# Altium PCB IMU_PCB_20241_VIAS02_MP.PcbDoc
Units mm, origin at the board's own origin, x right, y up, seen from the top; angles counter-clockwise.
Board outline 9 x 7 mm, 2 copper layers (Top Layer, Bottom Layer), stack 0.325 mm thick; 16 components, 20 nets, 87 pads, 33 vias.
Unrouted connection lines stored in the file: 2.
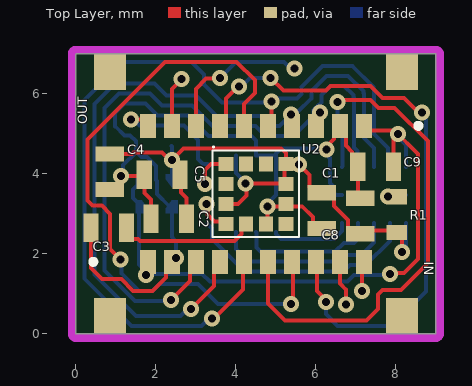
[diagram p0: Top Layer view]
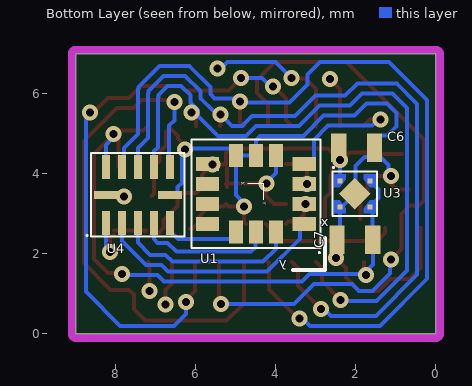
[diagram p1: Bottom Layer view, seen from below]
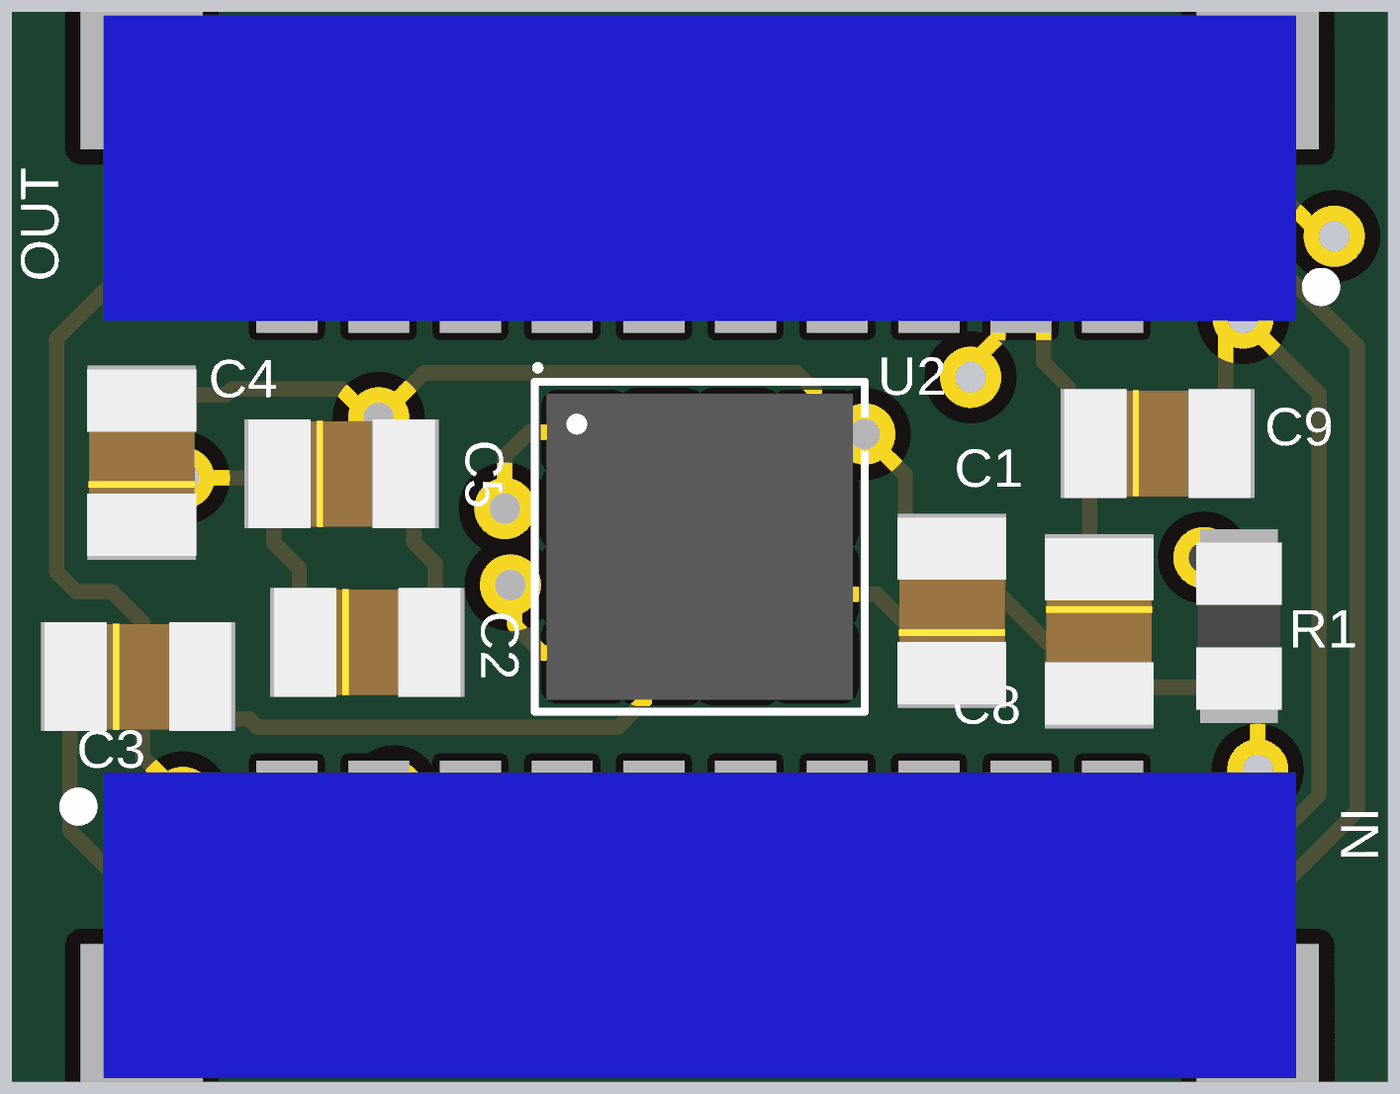
[diagram p2: 3D render of the assembled board from above, using the file's embedded part models]
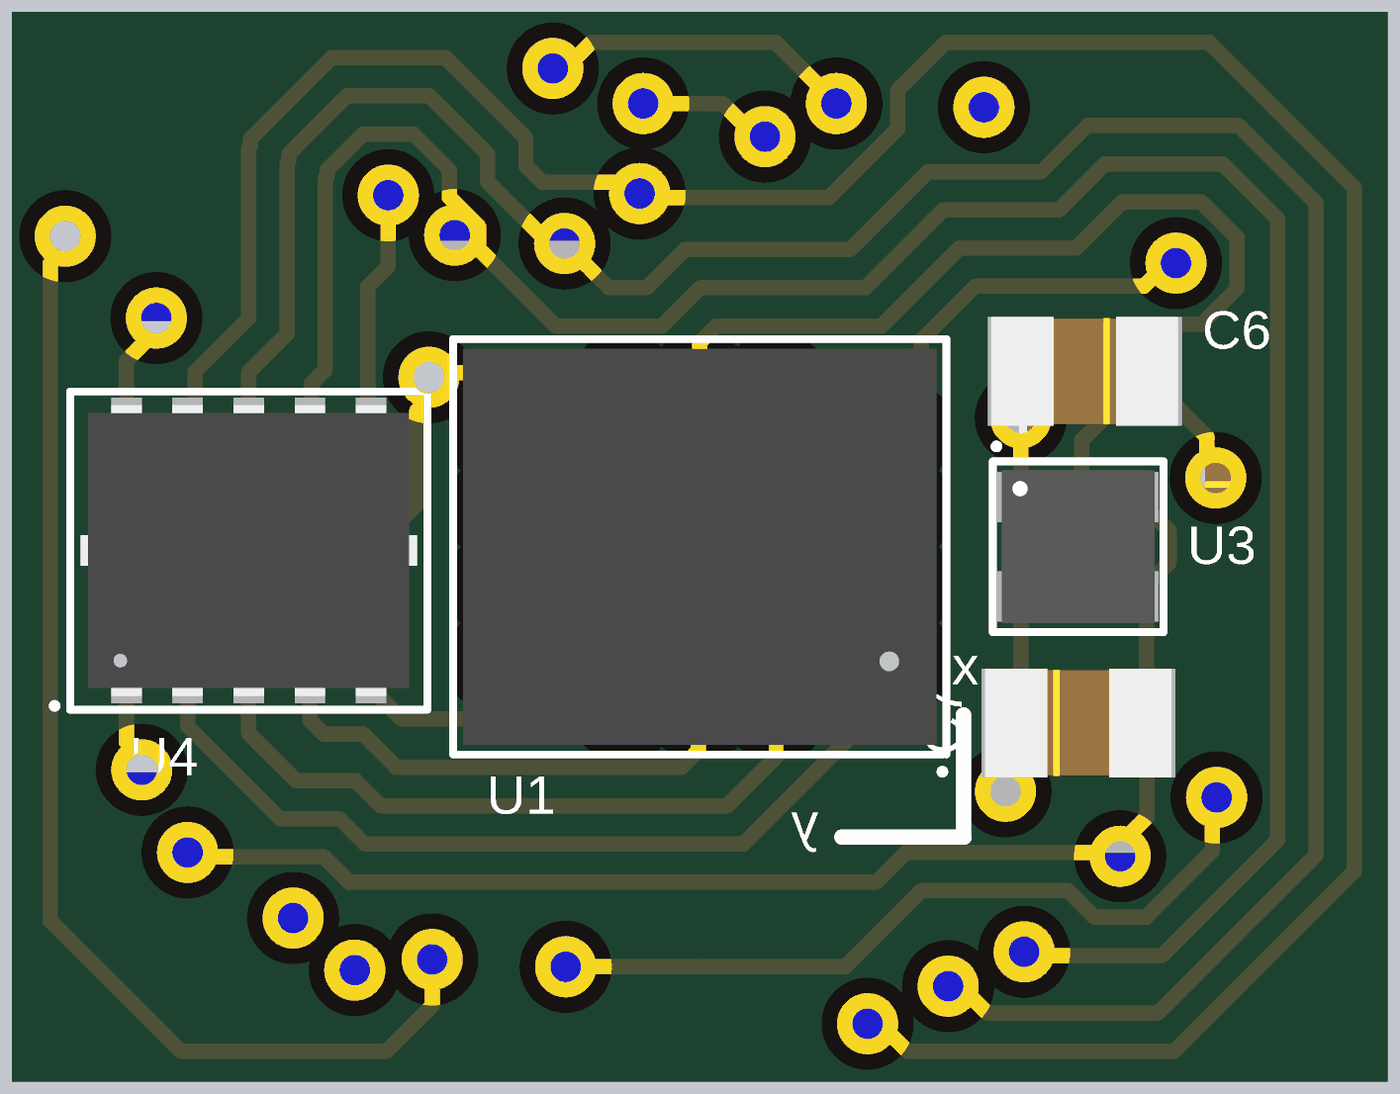
[diagram p3: 3D render of the assembled board from below, using the file's embedded part models]

## Layer stack, top to bottom
Top Solder: solder mask 0.0102, Solder Resist, Dk 3.5
Top Layer: signal copper 0.0356
Dielectric 1: core 0.254, FR-4, Dk 4.2
Bottom Layer: signal copper 0.0356
Solder Side: solder mask 0.0102, Solder Resist, Dk 3.5

## Board outline
0,7 0,0 9,0 9,7

## Design rules (kind name [scope] priority, off if disabled: settings)
Clearance Clearance_tracks [All] p1: gap=0.1 ignorepadtopadclearanceinfootprint=FALSE except(0: Arc-Hole Track-Hole SMDPad-Hole THPad-Hole Via-Hole Fill-Hole Poly-Hole Region-Hole Text-Hole; 0.15: Arc-Arc Arc-Track Arc-SMDPad Arc-THPad Arc-Via Arc-Fill Arc-Poly Arc-Region Track-Track Track-SMDPad Track-THPad Track-Via Track-Fill Track-Poly Track-Region)
Clearance Clearance_3 [OnLayer('Power Plane (VCC)') or InNet('4V')] p2: gap=0.254 ignorepadtopadclearanceinfootprint=FALSE except(0: Arc-Hole Track-Hole SMDPad-Hole THPad-Hole Via-Hole Fill-Hole Poly-Hole Region-Hole Text-Hole)
Clearance Clearance_2 [(InComponent('MPU-9250') AND OnLayer('Bottom Layer') AND HasFootprint('MPU-2950'))] p3: gap=0.1 ignorepadtopadclearanceinfootprint=FALSE except(0: Arc-Hole Track-Hole SMDPad-Hole THPad-Hole Via-Hole Fill-Hole Poly-Hole Region-Hole Text-Hole)
Clearance keepout [OnLayer('Keep-Out Layer')] p4: gap=0.1 ignorepadtopadclearanceinfootprint=FALSE except(0: Arc-Hole Track-Hole SMDPad-Hole THPad-Hole Via-Hole Fill-Hole Poly-Hole Region-Hole Text-Hole)
Clearance "Clearance - Vias Pad" [IsVia vs IsPad] p5: gap=0.1 ignorepadtopadclearanceinfootprint=FALSE except(0: Arc-Hole Track-Hole SMDPad-Hole THPad-Hole Via-Hole Fill-Hole Poly-Hole Region-Hole Text-Hole)
Clearance "Clearance Pad to Pad" [IsPad vs IsPad] p6: gap=0.1 ignorepadtopadclearanceinfootprint=FALSE except(0: Arc-Hole Track-Hole SMDPad-Hole THPad-Hole Via-Hole Fill-Hole Poly-Hole Region-Hole Text-Hole)
Clearance [All] p7: gap=0.1 ignorepadtopadclearanceinfootprint=FALSE except(0: Arc-Hole Track-Hole SMDPad-Hole THPad-Hole Via-Hole Fill-Hole Poly-Hole Region-Hole Text-Hole)
DiffPairsRouting [All] p1: maxlimit=0.254 minlimit=0.254 mostfreqgap=0.254 toplayer_minwidth=0.2 toplayer_maxwidth=0.381 toplayer_prefwidth=0.254 bottomlayer_minwidth=0.2 bottomlayer_maxwidth=0.381 bottomlayer_prefwidth=0.254 maxuncoupledlength=12.7
HoleToHoleClearance [All] p1: gap=0.1 allowstackedmicrovias=TRUE
MinimumSolderMaskSliver [All] p1: minsoldermaskwidth=0.02
PlaneConnect [All] p1: planeconnectstyle=Direct reliefexpansion=0.508 reliefentries=4 reliefconductorwidth=0.254 reliefairgap=0.254
PolygonConnect [All] p1: connectstyle=Direct reliefconductorwidth=0.254 reliefentries=4 polygonreliefangle="90 Angle" airgapwidth=0.254
RoutingLayers RoutingLayersPWR [(InNet('4V') OR InNet('5V') OR InNet('5V NON ISOLATED'))] p2: top layer_v5=TRUE bottom layer_v5=TRUE
RoutingPriority "RountingPriority Power" [(InNet('GND') OR InNet('POWER GND') OR InNet('5V') OR InNet('5V NON ISOLATED') OR InNet('24V'))] p1: routingpriority=10
RoutingPriority "RoutingPriority RS485" [(InNet('RS485_N') OR InNet('RS485_P'))] p2: routingpriority=8
RoutingPriority "RoutingPriority Hard Ones" [(InNet('SIGNAL 1 A') OR InNet('SIGNAL 1 B') OR InNet('SIGNAL 1 C') OR InNet('SIGNAL 3 A') OR InNet('SIGNAL 3 B') OR InNet('SIGNAL 3 C'))] p3: routingpriority=6
RoutingPriority [All] p4: routingpriority=0
RoutingVias [All] p1: holewidth=0.2 width=0.4 viastyle="Through Hole" minholewidth=0.2 minwidth=0.4 maxholewidth=0.35 maxwidth=0.7
SMDNeckDown [All] p1: percent=90.000
SilkToSilkClearance [All] p1: silktosilkclearance=0.1
SilkToSolderMaskClearance SilkscreenOverComponentPads [IsPad] p1: minsilkscreentomaskgap=0.02 clearancetoexposedcopper=FALSE
SolderMaskExpansion SolderMaskExpansion_via [IsVia] p1: expansion=-0.4 istentingtop=FALSE
SolderMaskExpansion [All] p2: expansion=0.102 istentingtop=FALSE
Width [All] p1: maxlimit=2 minlimit=0.1 preferedwidth=0.1 minimp=50.000000 maximp=50.000000 favimp=50.000000
Width "Width PowerPlane" [All] p2: maxlimit=0.635 minlimit=0.508 preferedwidth=0.508
23 further rules are at their usual default settings.

## Classes and differential pairs
component class IMU_PCB_2024: 3 C5 IN OUT U1 U2 U4

## Components (designator, comment, footprint, x,y, rotation, side; value= is the part's Value field where it differs from the comment)
C1 "100nF" C0402 6.15,3.081 r90 top
C2 "100nF" C0402 2.325,2.875 r0 top
C3 "220nF" C0402 0.825,2.65 r0 top
C4 "100nF" C0402 0.85,4.05 r90 top
C5 "10uF" C0402 2.158,3.976 r0 top
C6 "1uF" C0402 1.981,4.648 r0 bottom
C7 "1uF" C0402 2.024,2.347 r180 bottom
C8 "100nF" C0402 7.112,2.946 r270 top
C9 "100nF" C0402 7.495,4.175 r0 top
IN "JST SM10B-XSRS-ETB" SM10B-XSRS-ETB 4.5,1.8 r0 top locked
OUT "JST SM10B-XSRS-ETB" SM10B-XSRS-ETB 4.5,5.2 r180 top locked
R1 "10K" R0402 8.651,6.455 r270 top
U1 "LSM6DSRXTR" LSM6 4.5,3.5 r0 bottom locked
U2 "LIS2MDLTR" LIS 4.5,3.5 r0 top locked
U3 "LD39020ADTPU18R" LD3 2.025,3.5 r180 bottom
U4 "HPA01164RUTR" RUT12 7.45,3.475 r90 bottom

## Footprints (in the part's own frame and the unit in brackets; to place one, negate y for a bottom-side part, rotate by r counter-clockwise, add the part's x,y. Pads: shape width x height; smd on the part's side, far side on the other; paste and mask are expansions set on the pad)
C0402 [mil]
  rect 15x28 smd paste+0 mask+0: 1(-17.5,0) 2(17.5,0)
  body extent -24,-14 24,14, height 28
LD3 [mil]
  rect 5x5 smd paste-2.5 mask-2.5: 1(-14.75,12.75) 2(-14.75,-12.75) 3(14.75,-12.75) 4(14.75,12.75)
  rect 22x22 smd rot 45 paste-11 mask+0: 5(0,0)
  Top Layer region: 0,11 0,11 0,11 0,11 0,11 0,11 0,11 0,11
  Top Layer region: 0,-11 0,-11 0,-11 0,-11 0,-11 0,-11 0,-11 0,-11
  Top Layer region: 20.75,19.25 20.75,6.25 14.75,6.25 8.75,14.25 8.75,19.25
  Top Layer region: -20.75,-19.25 -20.75,-6.25 -14.75,-6.25 -8.75,-14.25 -8.75,-19.25
  Top Layer region: 20.75,-19.25 20.75,-6.25 14.75,-6.25 8.75,-14.25 8.75,-19.25
  Top Layer region: -20.75,19.25 -20.75,6.25 -14.75,6.25 -8.75,14.25 -8.75,19.25
  silkscreen extent -22,-22 22,26, body extent -20,-20 20,20, height 16
LIS [mm]
  rect 0.377x0.352 smd paste+0 mask+0.102: 1(-0.75,0.75) 2(-0.75,0.25) 3(-0.75,-0.25) 4(-0.75,-0.75) 7(0.75,-0.75) 8(0.75,-0.25) 9(0.75,0.25) 10(0.75,0.75)
  rect 0.352x0.377 smd paste+0 mask+0.102: 5(-0.25,-0.75) 6(0.25,-0.75) 11(0.25,0.75) 12(-0.25,0.75)
  silkscreen extent -1.08,-1.08 1.08,1.18, body extent -1,-1 1,1, height 0.7
LSM6 [mm]
  rect 0.577x0.352 smd paste+0 mask+0.102: 1(-1.21,0.75) 2(-1.21,0.25) 3(-1.21,-0.25) 4(-1.21,-0.75) 8(1.21,-0.75) 9(1.21,-0.25) 10(1.21,0.25) 11(1.21,0.75)
  rect 0.352x0.577 smd paste+0 mask+0.102: 5(-0.5,-0.956) 6(0,-0.956) 7(0.5,-0.956) 12(0.5,0.956) 13(0,0.956) 14(-0.5,0.956)
  silkscreen extent -1.61,-1.36 1.61,1.48, body extent -1.55,-1.3 1.55,1.3, height 0.87
R0402 [mil]
  rect 15x20 smd paste+0 mask+0: 1(119.31,-24.61) 2(154.31,-24.61)
  body extent 115,-36 158,-14, height 16
RUT12 [mm]
  rect 0.6x0.2 smd paste+0 mask+0: 1(-0.7,0.8) 2(-0.7,0.4) 3(-0.7,0) 4(-0.7,-0.4) 5(-0.7,-0.8) 7(0.7,-0.8) 8(0.7,-0.4) 9(0.7,0) 10(0.7,0.4) 11(0.7,0.8)
  rect 0.2x0.6 smd paste+0 mask+0: 6(0,-0.8) 12(0,0.8)
  silkscreen extent -1.04,-1.17 1.04,1.28, body extent -0.95,-1.1 0.95,1.1, height 0.6
SM10B-XSRS-ETB [mm] "JST XSR 10WAY angle, 0.6mm, SMD"
  rect 0.4x0.6 smd mask+0.05: 1(-2.7,0) 2(-2.1,0) 3(-1.5,0) 4(-0.9,0) 5(-0.3,0) 6(0.3,0) 7(0.9,0) 8(1.5,0) 9(2.1,0) 10(2.7,0)
  rect 0.8x0.9 smd: NC(-3.65,-1.35) NC(3.65,-1.35)
  silkscreen extent -4.11,-0.05 -4.01,0.05, body extent -3.9,-1.78 3.9,0.22, height 1.44

## Part data
C1 C2 C3 C4 C5 C6 C7 C8 C9: library part C0402, Mfr_Name=TDK
IN OUT: library part SM10B-XSRS-ETB, "JST 10WAY angle XSR, SMT, 0.6mm, SM10B-XSRS-ETB", Manufacturer=JST, Supplier Part Number 1=90W0858, Catalogue Price=1,192, Category=Connecteurs, ComponentLink1Description=http://datasheet.octopart.com/SM10B-XSRS-ETB-JST-datasheet-12514066.pdf, ComponentLink1URL=http://datasheet.octopart.com/SM10B-XSRS-ETB-JST-datasheet-12514066.pdf, ComponentLink2Description=http://www.farnell.com/datasheets/1706598.pdf, ComponentLink2URL=http://www.farnell.com/datasheets/1706598.pdf, Contact Material=Copper, Contact Plating=Tin, Contact Termination Type="Through Hole", contact_material=Copper, contact_plating=Tin, Courant=0.2A, Currency=EUR, gender=Male, Manufacturer Part Number=SM10B-XSRS-ETB, Matériau du contact="Alliage de cuivre", Minimum Order Quantity=5, mounting_style="Through Hole", Méthode de raccordement="Montage en surface", No. of Contacts=10, No. of Rows=1, Nombre de contacts=10, Nombre de rangées=1, number_of_contacts=10, Numéro de série=SM10B, Octopart Url=http://octopart.com/sm10b-xsrs-etb-jst-29522047, OctopartID=60b7a87f3daebf70, Orientation du corps=Droit, Pas=0.6mm, Pitch Spacing=0.6, Product Range="XSR Series", Product Status=IN_STOCK, Product StockNumber=820-1677, RoHS=YES, rohs_status=Compliant, Seller Landing  Url=https://octopart-clicks.com/click/track?country=IT&ak=8157f166&sig=06796d5&sid=2402&ppid=29522047&vpid=200245201&ct=offers, Stock 1=0, Stock 2=0, Supplier 1=Newark, Supplier 2=RS-Components, Supplier Part Number 2=820-1677, Séries=XSR, Tension="30 V c.a./c.c.", Type="Fil à carte"
R1: library part R0402, "No Description Available", Mfr_Name="Stackpole International"
U1 U2 U3: "No Description Available", Mfr_Name=STMicroelectronics, RefDes=RefDes, Type=Type
U4: "No Description Available", Mfr_Name="Texas Instruments", RefDes=RefDes, Type=Type

## Via types
v1: diameter 0.4, hole 0.2, Top Layer to Bottom Layer, 33 vias

## Nets (pads, with @x,y where several pads share a name; then routed paths per layer and width w, separated by ;. In a path a pad name is that pad's centre, name@x,y a point inside that pad or via, vN(x,y) a via of type N, cw(c..) or ccw(c..) an arc to the next point about the centre after c; other vN are vias at no path point)
1V8: C1.2 C2.2 C4.2 C5.2 C6.2 C8.2 R1.2 U1.5 U1.8 U2.3 U2.9 U2.10 U3.1 U4.1 | length 15.8
  Top Layer w0.1: C4.2 1.403,4.495 1.44,4.532 2.154,4.532 2.343,4.343 v1(2.4,4.343) ; C2.2 2.769,3.391 2.631,3.529 2.631,3.947 C5.2 2.602,4.141 v1(2.4,4.343) ; U2.3 4.05,3.25 4.262,3.462 v1@4.262,3.762 ; v1(4.238,3.762) v1@4.262,3.762 ; U2.9@5.221,3.673 U2.10@5.221,4.129 ; U2.9 5.238,3.762 v1@4.262,3.762 ; C8.2 6.947,2.502 6.806,2.642 6.806,2.842 6.456,3.193 6.456,3.385 6.315,3.525 5.985,3.525 5.844,3.666 5.844,3.972 v1(5.58,4.237) 5.263,4.237 U2.10 5.25,4.523 5.135,4.638 2.695,4.638 v1(2.4,4.343) ; C8.2@7.249,2.58 C8.2@7.275,2.555 ; C8.2@7.3,2.58 R1.2@8.051,2.58 ; R1.2@8.051,2.475 8.07,2.475 8.15,2.395 v1(8.15,2.041)
  Bottom Layer w0.1: C6.2@2.389,4.7 2.4,4.689 v1(2.4,4.343) 2.401,4.342 2.401,3.993 2.4,3.992 U3.1 ; U1.5 4,4.018 4.238,3.78 v1(4.238,3.762) ; v1(5.58,4.237) 5.592,4.25 U1.8 ; v1(8.15,2.041) 8.15,2.122 8.25,2.222 U4.1
CSI: IN.6 U4.7 | length 13.5
  Top Layer w0.1: IN.6 4.8,0.763 5.233,0.33 7.264,0.33 7.55,0.616 7.55,0.983 7.667,1.1 8.129,1.1 8.8,1.771 8.8,4.816 7.966,5.65 7.564,5.65 7.364,5.85 6.587,5.85 v1(6.537,5.8)
  Bottom Layer w0.1: v1(6.537,5.8) 6.537,5.338 6.671,5.204 6.671,4.196 U4.7
Csi_1V8: U1.12 U4.5 | length 2
  Bottom Layer w0.1: U1.12 5,2.5 5.126,2.374 6.449,2.374 6.65,2.575 U4.5
GND: C1.1 C2.1 C3.1 C4.1 C5.1 C6.1 C7.1 C8.1 C9.1 IN.2 OUT.2 U1.6 U1.7 U2.6 U2.8 U3.2 U3.5 U4.6 | length 25.3
  Top Layer w0.1: C3.1 0.381,1.644 0.653,1.372 1.136,1.372 1.433,1.075 1.916,1.075 2.25,1.409 2.25,1.65 v1(2.5,1.9) ; C4.1@0.685,3.606 C4.1 0.984,3.606 1.125,3.746 v1(1.125,3.95) 1.687,3.95 C5.1 1.713,3.527 1.88,3.359 C2.1 ; U2.6 4.791,2.791 4.791,3.142 v1@4.75,3.183 ; v1(4.791,3.183) 5.183,3.183 U2.8 5.31,3.19 5.656,3.19 5.928,2.918 5.928,2.777 6.069,2.636 C1.1 ; v1(6.271,4.609) 6.271,4.689 6.45,4.867 6.45,4.95 6.629,5.129 6.671,5.129 6.75,5.05 6.75,4.706 6.909,4.547 6.909,4.315 C9.1 7.05,3.504 C8.1@7.112,3.442
  Bottom Layer w0.1: v1(1.125,3.95) 1.182,4.007 1.182,4.217 1.5,4.535 C6.1@1.5,4.561 ; v1(2.5,1.9) 2.5,2.316 C7.1 2.4,2.416 U3.2 2.386,3.19 2.335,3.19 U3.5 2.025,3.824 2.003,3.847 2.003,4.197 1.779,4.421 1.641,4.421 C6.1@1.5,4.561 ; v1(4.791,3.183) 4.791,3.261 5,3.47 U1.7 ; v1(6.271,4.609) 6.243,4.637 5.126,4.637 5,4.512 U1.7 ; v1@6.3,4.637 6.329,4.609 6.329,4.413 6.35,4.391 6.35,3.775 6.459,3.666 6.459,3.525 6.509,3.475 U4.6 ; C6.1@1.5,4.561 1.5,4.815 1.359,4.956 1.219,4.956 0.985,5.19 0.985,5.521 1.219,5.756 1.737,5.756 2.039,5.454 2.803,5.454 3.312,4.945 4.392,4.945 4.5,4.837 U1.6 U1.7
INT1: OUT.10 U1.4 | length 3.1
  Top Layer w0.1: v1(1.385,5.356) 1.65,5.356 1.8,5.206 OUT.10
  Bottom Layer w0.1: v1(1.385,5.356) 1.442,5.356 1.593,5.204 2.699,5.204 3.051,4.851 3.051,4.376 3.177,4.25 U1.4
NetC3_2: C3.2 U2.5 | length 3.5
  Top Layer w0.1: C3.2 1.27,2.516 1.41,2.375 1.551,2.375 1.607,2.319 3.966,2.319 4.138,2.491 4.138,2.638 U2.5
NetIN_7: IN.7 OUT.6 | length 16
  Top Layer w0.1: v1(1.119,1.86) 0.858,2.121 0.858,3.002 0.654,3.206 0.421,3.206 0.294,3.332 0.294,4.862 2.233,6.8 4.022,6.8 4.473,6.349 4.473,6.017 4.2,5.744 OUT.6 ; v1(5.377,0.752) 5.425,0.8 5.425,1.775 IN.7
  Bottom Layer w0.1: v1(1.119,1.86) 1.147,1.832 1.147,1.51 1.582,1.075 1.916,1.075 2.091,1.25 3.05,1.25 3.548,0.752 v1(5.377,0.752)
NetIN_8: IN.8 OUT.7 | length 15.2
  Top Layer w0.1: OUT.7 3.75,5.35 3.75,5.88 4.053,6.183 v1(4.073,6.183) ; v1(4.87,6.4) 5.187,6.083 6.255,6.083 6.372,6.2 7.367,6.2 7.667,5.9 8.2,5.9 8.569,5.532 v1(8.65,5.532) ; IN.8 6.025,1.775 6.025,1.07 6.25,0.845 v1(6.25,0.8)
  Bottom Layer w0.1: v1(4.073,6.183) 4.134,6.183 4.351,6.4 v1(4.87,6.4) ; v1(6.25,0.8) 6.25,0.497 6.547,0.2 7.896,0.2 8.75,1.054 8.75,5.35 8.707,5.393 8.707,5.474 v1(8.65,5.532)
NetIN_9: IN.9 OUT.8 | length 4.9
  Top Layer w0.1: OUT.8 3,6.123 3.256,6.38 3.586,6.38 v1(3.606,6.4) ; IN.9 6.6,1.259 6.756,1.102 v1(6.756,0.73)
  Bottom Layer w0.1: v1(3.606,6.4) 4.006,6.8 5.209,6.8 5.38,6.629 v1(5.461,6.629)
NetIN_10: IN.10 OUT.9 | length 2.1
  Top Layer w0.1: OUT.9@2.362,5.238 OUT.9 2.4,6.122 2.642,6.364 v1(2.642,6.375) ; v1(7.16,1.071) 7.16,1.76 IN.10
NetR1_1: R1.1 U4.12 | length 0.7
  Top Layer w0.1: v1(7.798,3.429) 7.802,3.425 R1.1
  Bottom Layer w0.1: v1(7.798,3.429) 7.821,3.452 8.227,3.452 U4.12
NetU1_2: U1.2 U2.4 | length 0.8
  Top Layer w0.1: v1(3.262,3.25) 3.291,3.221 3.291,2.984 3.47,2.805 3.695,2.805 U2.4
NetU1_3: U1.3 U2.1 | length 0.9
  Top Layer w0.1: v1(3.225,3.75) 3.225,4.092 3.383,4.25 U2.1
SCK: IN.3 OUT.3 U4.8 | length 17.3
  Top Layer w0.1: v1(2.378,0.85) 2.85,1.322 2.85,1.65 IN.3 ; OUT.3 6,5.436 v1(6.103,5.539)
  Bottom Layer w0.1: v1(2.378,0.85) 2.353,0.825 1.479,0.825 0.719,1.585 0.719,5.644 1.081,6.006 1.85,6.006 2.152,5.704 2.906,5.704 3.415,5.195 4.496,5.195 4.746,4.945 5.441,4.945 5.946,5.45 5.946,5.595 v1@6.042,5.69 ; v1(6.103,5.539) 6.045,5.596 6.045,5.687 v1@6.042,5.69 ; U4.8 7.042,4.183 7.042,4.566 6.95,4.658 6.95,5.906 6.937,5.919 6.937,5.966 6.703,6.2 6.372,6.2 6.137,5.966 6.137,5.786 v1@6.042,5.69
SCK_1V8: U1.13 U4.4 | length 3.5
  Bottom Layer w0.1: U1.13 4.511,2.533 4.511,2.164 4.62,2.055 6.484,2.055 6.704,2.275 6.958,2.275 7.05,2.367 U4.4
SDI: IN.4 OUT.4 U4.9 | length 19.1
  Top Layer w0.1: v1(2.875,0.625) 3.45,1.2 3.45,1.65 IN.4 ; v1(5.384,5.484) 5.384,5.216 OUT.4
  Bottom Layer w0.1: v1(2.875,0.625) 2.794,0.625 2.619,0.45 1.5,0.45 0.469,1.481 0.469,5.748 0.977,6.256 1.964,6.256 2.266,5.954 3.01,5.954 3.519,5.445 4.599,5.445 4.849,5.195 5.095,5.195 5.441,5.541 5.539,5.541 5.888,5.89 5.888,6.069 6.268,6.45 6.807,6.45 7.187,6.069 7.187,6.023 7.2,6.01 7.2,4.892 7.45,4.642 U4.9
SDI_1V8: U1.14 U4.3 | length 4.7
  Bottom Layer w0.1: U1.14 4,2.125 4.32,1.805 6.588,1.805 6.753,1.971 7.141,1.971 7.45,2.28 U4.3
SDO: IN.5 OUT.5 U4.10 | length 21.7
  Top Layer w0.1: v1(3.402,0.379) 3.448,0.379 4.175,1.106 4.175,1.775 IN.5 ; OUT.5 4.893,5.293 v1(4.893,5.811)
  Bottom Layer w0.1: v1(3.402,0.379) 3.321,0.379 3.142,0.2 1.397,0.2 0.219,1.377 0.219,5.851 1.168,6.8 2.891,6.8 3.206,6.484 3.206,6.234 3.658,5.783 4.865,5.783 4.966,5.884 5.528,5.884 5.638,5.993 5.638,6.173 6.165,6.7 6.91,6.7 7.438,6.173 7.438,6.126 7.45,6.114 7.45,4.996 7.8,4.646 7.8,4.225 U4.10
SDO_1V8: U1.1 U4.2 | length 6
  Bottom Layer w0.1: U1.1 3.402,2.637 3.402,2.369 4.216,1.555 6.691,1.555 6.856,1.721 7.244,1.721 7.85,2.326 U4.2
VDD: C7.2 C9.2 IN.1 OUT.1 U3.3 U3.4 U4.11 | length 16.2
  Top Layer w0.1: v1(1.75,1.475) 1.8,1.525 IN.1 ; OUT.1 7.323,5.077 v1@7.973,5.077 ; v1(7.85,1.5) 7.875,1.525 8.2,1.525 8.55,1.875 8.55,4.5 v1@7.973,5.077 ; C9.2 7.939,5.043 v1@7.973,5.077
  Bottom Layer w0.1: U3.4 1.43,3.603 1.43,3.397 U3.3 1.579,3.105 C7.2 1.575,2.343 1.575,1.731 1.75,1.556 v1(1.75,1.475) 1.775,1.5 3.154,1.5 3.348,1.305 6.795,1.305 6.96,1.471 7.821,1.471 v1(7.85,1.5) ; v1(8.054,4.996) 8.054,4.915 8.25,4.719 U4.11
pads on no net: IN.NC OUT.NC U1.9 U1.10 U1.11 U2.2 U2.7 U2.11 U2.12

## Keep-outs
Keep-Out Layer:
  lines w0.2: -0.1,0 ccw(c0,0) 0,-0.1 ; -0.1,0 ccw(c0,0) 0,-0.1 ; -0.1,0 -0.1,7 ; -0.1,7 cw(c0,7) 0,7.1 ; -0.1,7 cw(c0,7) 0,7.1 ; 0,-0.1 9,-0.1 ; 0,7.1 9,7.1 ; 9,-0.1 ccw(c9,0) 9.1,0 ; 9,-0.1 ccw(c9,0) 9.1,0 ; 9,7.1 cw(c9,7) 9.1,7 ; 9,7.1 cw(c9,7) 9.1,7 ; 9.1,0 9.1,7

## Silkscreen, mask and mechanical layers (free items; w line width, h text height)
Bottom Overlay:
  lines w0.1: 2.77,1.601 3.57,1.601 ; 2.775,1.6 2.775,2.4
  text "x" at 2.675,2.6 h0.4
  text "y" at 3.725,1.575 h0.4

## Text inside footprints (layer, text, board x,y; h text height)
U1: Bottom Overlay "X" at 4.743,3.802 h0.15 r270; Bottom Overlay "Y" at 4.362,3.306 h0.15 r90